# EAGLE board scout_mk1 (EAGLE 7.1.0)
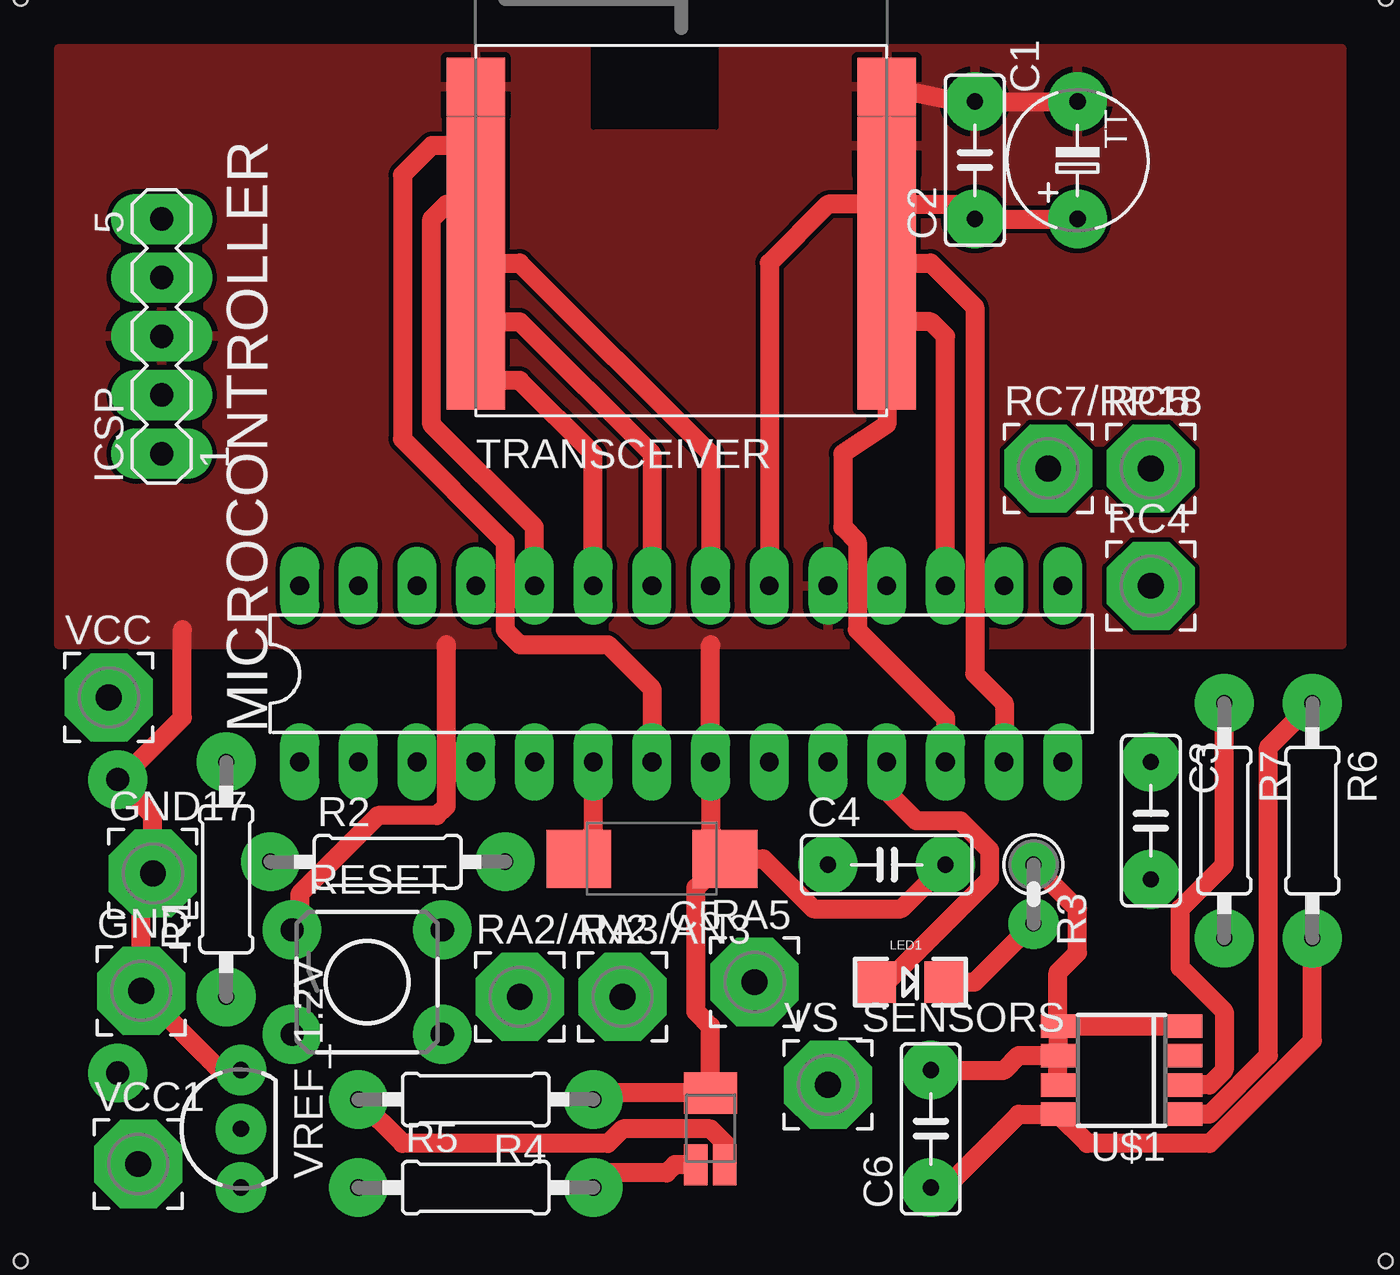
[diagram p0: board, top side]
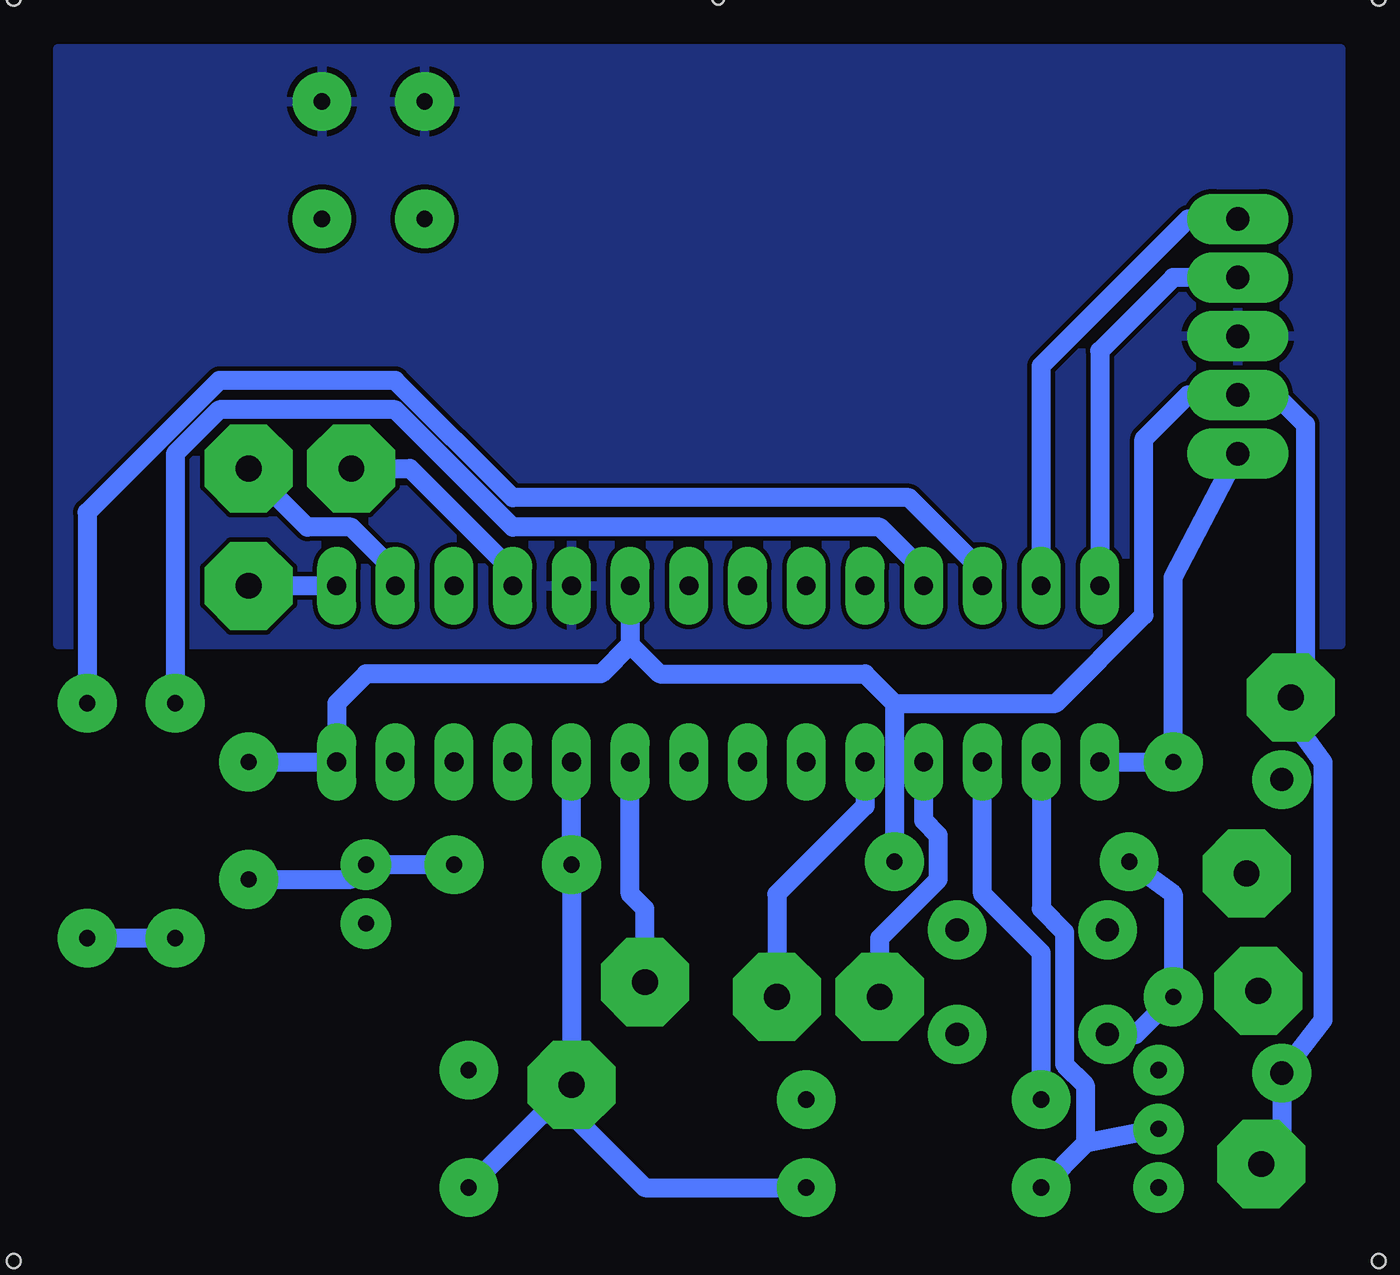
[diagram p1: board, bottom side, seen from below]

No outline drawn. Coordinates in mm, seen from the top.
Copper layers (1*16): Top 0.035mm / dielectric 1.5mm / Bottom 0.035mm
Design rules "default *": minimum track width 10mil, minimum drill 24mil, track to track 8mil, track to pad 8mil, pad to pad 8mil, via to via 8mil, smd to smd 8mil, copper to edge 40mil, drill to drill 8mil, minimum pad ring 10mil, minimum via ring 8mil, stop-mask expansion 4mil, vias tented up to drill 0mil, thermal gap 10mil
Holes 0.6 mm at 8.89,59.69 8.89,5.08 67.94,5.08 67.94,59.69
Holes 0.5 mm at 37.47,59.69

## Footprints (pad centres in the part's own frame; a part is rotated, then mirrored left to right if it is on the bottom)
2XAAA = drill 1 pad 2.54: P$1 0,12.7; P$2 0,0
TT5D6 = drill 0.7 pad 2.54: + -2.54,0; - 2.54,0
C050-025X075 = drill 0.7 pad 2.54: 1 -2.54,0; 2 2.54,0
C/6032-28R = smd 2.794 x 2.5: + 3.16,0; - -3.16,0
3,81/1,1 = drill 1.118 pad 3.81 octagon: 1 0,0
MA05-1 = drill 1.016 pad 2.184 long: 1 -5.08,0; 2 -2.54,0; 3 0,0; 4 2.54,0; 5 5.08,0
LED-1206 = smd 1.778 x 1.778: A -1.5,0; C 1.5,0
SFH5711 = smd 2.286 x 1.778: 1_2 0,1.549 | smd 1.016 x 1.778: 3 -0.635,-1.549; 4 0.61,-1.549
DIL28-3 = drill 0.813 pad 1.676 long: 1 -16.51,-3.81; 2 -13.97,-3.81; 3 -11.43,-3.81; 4 -8.89,-3.81; 5 -6.35,-3.81; 6 -3.81,-3.81; 7 -1.27,-3.81; 8 1.27,-3.81; 9 3.81,-3.81; 10 6.35,-3.81; 11 8.89,-3.81; 12 11.43,-3.81; 13 13.97,-3.81; 14 16.51,-3.81; 15 16.51,3.81; 16 13.97,3.81; 17 11.43,3.81; 18 8.89,3.81; 19 6.35,3.81; 20 3.81,3.81; 21 1.27,3.81; 22 -1.27,3.81; 23 -3.81,3.81; 24 -6.35,3.81; 25 -8.89,3.81; 26 -11.43,3.81; 27 -13.97,3.81; 28 -16.51,3.81
0207/10 = drill 0.7 pad 2.54: 1 -5.08,0; 2 5.08,0
0207/2V = drill 0.7 pad 2.184: 1 -1.27,0; 2 1.27,0
TACTILE-PTH = drill 1 pad 2.54: 1 -3.251,2.261; 2 3.251,2.261; 3 -3.251,-2.261; 4 3.251,-2.261
MRF89XAMXA = smd 2.515 x 2.515: 1 -8.89,-1.27; 2 -8.89,-3.81; 3 -8.89,-6.35; 4 -8.89,-8.89; 5 -8.89,-11.43; 6 -8.89,-13.97; 7 8.89,-13.97; 8 8.89,-11.43; 9 8.89,-8.89; 10 8.89,-6.35; 11 8.89,-3.81; 12 8.89,-1.27
SOIC8 = smd 1.016 x 1.5: 1 -1.905,-2.75; 2 -0.635,-2.75; 3 0.635,-2.75; 4 1.905,-2.75; 5 1.905,2.75; 6 0.635,2.75; 7 -0.635,2.75; 8 -1.905,2.75
LP_O-PBCY-W3 = drill 0.7 pad 2.184: 1 -2.54,0; 2 0,0; 3 2.54,0

## Placement (x,y rotation side)
BATT1  AAA  [2XAAA]  13.08,13.21 0 top
C1  10uF  [TT5D6]  54.61,52.7 90 top
C2  0.1uF  [C050-025X075]  50.16,52.7 90 top
C3  0.1uF  [C050-025X075]  57.78,24.13 270 top
C4  0.1uF  [C050-025X075]  46.35,22.23 0 top
C5  10uF  [C/6032-28R]  36.2,22.48 180 top
C6  0.01uF  [C050-025X075]  48.26,10.79 90 top
GND  [3,81/1,1]  14.1,16.76 0 top
GND17  [3,81/1,1]  14.61,21.84 0 top
ICSP  [MA05-1]  14.99,45.09 90 top
LED1  [LED-1206]  47.37,17.14 0 top
LIGHTSENSOR  SFH5711OSRAM  [SFH5711]  38.73,10.79 0 top
MICROCONTROLLER  PIC18F27J53SP  [DIL28-3]  37.47,30.48 0 top
R1  100  [0207/10]  17.78,21.59 90 top
R2  10k  [0207/10]  24.77,22.35 0 top
R3  10k  [0207/2V]  52.7,20.95 270 top
R4  47k  [0207/10]  28.57,12.06 180 top
R5  1k  [0207/10]  28.57,8.26 0 top
R6  10k  [0207/10]  64.77,24.13 270 top
R7  10k  [0207/10]  60.96,24.13 270 top
RA2/AN2  [3,81/1,1]  30.48,16.51 0 top
RA3/AN3  [3,81/1,1]  34.92,16.51 0 top
RA5  [3,81/1,1]  40.64,17.14 0 top
RC4  [3,81/1,1]  57.78,34.29 0 top
RC5  [3,81/1,1]  57.78,39.37 0 top
RC7/RP18  [3,81/1,1]  53.34,39.37 0 top
RESET  SWITCH-MOMENTARY-2PTH  [TACTILE-PTH]  23.88,17.14 0 top
TRANSCEIVER  MRF89XAM8A  [MRF89XAMXA]  37.47,57.15 0 top
U$1  TMP75CSOIC8  [SOIC8]  56.52,13.34 90 top
VCC  [3,81/1,1]  12.7,29.46 0 top
VCC1  [3,81/1,1]  13.97,9.27 0 top
VREF_1.2V  LM285-1.21.2LP  [LP_O-PBCY-W3]  18.41,10.79 90 top
VS_SENSORS  [3,81/1,1]  43.81,12.7 0 top

## Library data of the parts
BATT1 LIGHTSENSOR U$1 = nio
C1 C5 = resistor
C2-C4 C6 = rcl
GND GND17 RA2/AN2 RA3/AN3 RA5 RC4 RC5 RC7/RP18 VCC VCC1 VS_SENSORS = wirepad
ICSP = con-lstb; OC_FARNELL: unknown; OC_NEWARK: unknown
LED1 = SparkFun-LED
MICROCONTROLLER = microchip; MPN: PIC18F27J53-I/SP; OC_FARNELL: unknown; OC_NEWARK: 63R7839
R1-R7 = resistor; SPICEPREFIX: R
RESET = SparkFun-Electromechanical
TRANSCEIVER = microchip2
VREF_1.2V = texas

## Nets
GND: BATT1.P$1 C1.- C2.2 C3.2 C4.2 C5.- C6.2 GND17.1 GND.1 ICSP.3 LIGHTSENSOR.1_2 MICROCONTROLLER.8 MICROCONTROLLER.19 R3.1 R4.1 RESET.1 TRANSCEIVER.1 TRANSCEIVER.11 TRANSCEIVER.12 U$1.4 U$1.5 U$1.6 U$1.7 VREF_1.2V.3
N$2: LIGHTSENSOR.4 MICROCONTROLLER.3 R4.2
N$3: ICSP.1 MICROCONTROLLER.1 R1.2
N$4: C5.+ MICROCONTROLLER.6
N$5: R1.1 R2.1 RESET.3
N$6: ICSP.4 MICROCONTROLLER.28
N$7: ICSP.5 MICROCONTROLLER.27
N$8: MICROCONTROLLER.2 R5.1 VREF_1.2V.2
N$9: MICROCONTROLLER.7 TRANSCEIVER.2
N$10: MICROCONTROLLER.23 TRANSCEIVER.6
N$11: MICROCONTROLLER.26 R6.1 U$1.1
N$12: MICROCONTROLLER.25 R7.1 U$1.2
N$13: MICROCONTROLLER.9 RA5.1
N$14: LED1.C R3.2
N$15: LED1.A MICROCONTROLLER.11
N$16: MICROCONTROLLER.4 RA2/AN2.1
N$17: MICROCONTROLLER.5 RA3/AN3.1
N$19: MICROCONTROLLER.12 TRANSCEIVER.7
N$21: MICROCONTROLLER.24 TRANSCEIVER.3
N$22: MICROCONTROLLER.22 TRANSCEIVER.5
N$23: MICROCONTROLLER.21 TRANSCEIVER.4
N$24: MICROCONTROLLER.13 TRANSCEIVER.9
N$25: MICROCONTROLLER.17 TRANSCEIVER.8
N$26: MICROCONTROLLER.18 RC7/RP18.1
N$27: MICROCONTROLLER.16 RC5.1
N$28: MICROCONTROLLER.15 RC4.1
N$29: C4.1 C6.1 LIGHTSENSOR.3 MICROCONTROLLER.10 R5.2 R6.2 R7.2 U$1.8 VS_SENSORS.1
VCC: BATT1.P$2 C1.+ C2.1 C3.1 ICSP.2 MICROCONTROLLER.14 MICROCONTROLLER.20 R2.2 TRANSCEIVER.10 VCC1.1 VCC.1

## Tracks (layer width: path | path; a pad name or v marks a point on that pad's centre or on a via)
GND
  Top 0.813: C5.- 38.73,23.73 MICROCONTROLLER.8 38.73,31.75 | 27.3,31.75 27.3,24.77 26.89,24.35 24.35,24.35 20.95,20.95 20.95,19.74 RESET.1 | TRANSCEIVER.12 49.53,55.24 C2.2 C1.- | C5.- 41.02,22.48 43.18,20.32 46.99,20.32 C4.2 | C5.- 38.1,21.22 38.1,15.88 38.73,15.24 LIGHTSENSOR.1_2 33.93,12.34 R4.1 | C6.2 51.44,13.34 52.07,13.97 U$1.6 | U$1.7 U$1.6 | U$1.5 U$1.6 | U$1.5 53.77,17.57 54.61,18.41 54.61,20.32 R3.1 | U$1.4 U$1.5 | 15.88,32.38 15.88,28.57 13.21,25.91 BATT1.P$1 14.61,24.38 GND17.1 14.1,21.34 GND.1 17.53,13.34 VREF_1.2V.3
  Bottom 0.813: C3.2 53.34,21.59 R3.1 C4.2
  pour Bottom (isolate 0.025): 10.54,57.53 10.54,31.75 66.04,31.75 66.04,57.53
  pour Top (isolate 0.025): 10.54,57.53 10.54,31.75 66.04,31.75 66.04,57.53
N$2
  Top 0.813: LIGHTSENSOR.4 39.34,10.19 38.73,10.79 34.92,10.79 34.29,10.16 25.4,10.16 R4.2
  Bottom 0.813: R4.2 23.5,18.41 26.04,20.95 MICROCONTROLLER.3
N$3
  Bottom 0.813: MICROCONTROLLER.1 R1.2 17.78,34.67 ICSP.1
N$4
  Top 0.813: MICROCONTROLLER.6 33.66,23.73 C5.+
N$5
  Bottom 0.813: RESET.3 19.41,14.88 R1.1 17.78,20.95 R2.1
N$6
  Bottom 0.813: ICSP.4 17.78,47.62 20.95,44.45 MICROCONTROLLER.28
N$7
  Bottom 0.813: MICROCONTROLLER.27 23.5,43.81 17.14,50.16 ICSP.5
N$8
  Bottom 0.813: VREF_1.2V.2 21.59,10.16 | 21.59,10.16 R5.1 | MICROCONTROLLER.2 23.5,20.32 22.48,19.3 22.48,13.59 21.59,12.7 21.59,10.16
N$9
  Top 0.813: TRANSCEIVER.2 26.67,53.34 25.4,52.07 25.4,40.64 29.84,36.2 29.84,32.38 30.48,31.75 34.29,31.75 36.2,29.84 MICROCONTROLLER.7
N$10
  Top 0.813: MICROCONTROLLER.23 33.66,40.01 30.48,43.18 TRANSCEIVER.6
N$11
  Top 0.813: R6.1 62.87,27.3 62.87,13.97 60.33,11.43 U$1.1
  Bottom 0.813: MICROCONTROLLER.26 26.04,34.92 29.21,38.1 46.35,38.1 51.44,43.18 59.05,43.18 64.77,37.47 R6.1
N$12
  Top 0.813: R7.1 60.96,22.23 59.05,20.32 59.05,17.78 60.96,15.88 60.96,13.34 60.33,12.7 U$1.2
  Bottom 0.813: MICROCONTROLLER.25 28.57,34.92 30.48,36.83 46.35,36.83 51.44,41.91 59.05,41.91 60.96,40.01 R7.1
N$13
  Bottom 0.813: RA5.1 40.64,20.32 41.27,20.95 MICROCONTROLLER.9
N$14
  Top 0.813: LED1.C 50.16,17.14 R3.2
N$15
  Top 0.813: MICROCONTROLLER.11 46.35,25.4 47.62,24.13 49.53,24.13 50.8,22.86 50.8,21.59 46.35,17.14 LED1.A
N$16
  Bottom 0.813: RA2/AN2.1 30.48,19.05 27.94,21.59 27.94,23.5 28.57,24.13 MICROCONTROLLER.4
N$17
  Bottom 0.813: MICROCONTROLLER.5 31.11,24.77 34.92,20.95 RA3/AN3.1
N$19
  Top 0.813: TRANSCEIVER.7 46.35,41.27 44.45,40.01 44.45,36.83 45.09,36.2 45.09,32.38 48.9,28.57 MICROCONTROLLER.12
N$21
  Top 0.813: MICROCONTROLLER.24 31.11,36.83 26.67,41.27 26.67,50.16 27.3,50.8 TRANSCEIVER.3
N$22
  Top 0.813: TRANSCEIVER.5 30.48,45.72 36.2,40.01 MICROCONTROLLER.22
N$23
  Top 0.813: TRANSCEIVER.4 30.48,48.26 38.73,40.01 MICROCONTROLLER.21
N$24
  Top 0.813: TRANSCEIVER.9 48.26,48.26 50.16,46.35 50.16,30.48 51.44,29.21 MICROCONTROLLER.13
N$25
  Top 0.813: MICROCONTROLLER.17 48.9,45.09 48.26,45.72 TRANSCEIVER.8
N$26
  Bottom 0.813: RC7/RP18.1 50.8,39.37 46.35,34.92 MICROCONTROLLER.18
N$27
  Bottom 0.813: MICROCONTROLLER.16 51.44,34.92 53.34,36.83 55.24,36.83 RC5.1
N$28
  Bottom 0.813: MICROCONTROLLER.15 RC4.1
N$29
  Top 0.813: R6.2 64.77,14.61 60.33,10.16 55.03,10.16 U$1.8 52.07,11.43 48.9,8.26 C6.1 | LIGHTSENSOR.3 37.19,9.25 36.83,8.89 34.29,8.89 R5.2
  Bottom 0.813: R6.2 R7.2 | MICROCONTROLLER.10 C4.1 VS_SENSORS.1 43.81,11.43 | 43.81,11.43 40.64,8.26 R5.2 | 43.81,11.43 45.09,11.43 C6.1
VCC
  Top 0.813: MICROCONTROLLER.20 41.27,48.26 43.81,50.8 TRANSCEIVER.10 49.53,50.8 C2.1 C1.+
  Bottom 0.813: 41.27,31.75 42.55,30.48 52.7,30.48 53.98,29.21 MICROCONTROLLER.14 C3.1 | MICROCONTROLLER.20 41.27,31.75 | 41.27,31.75 40.01,30.48 31.11,30.48 29.84,29.21 | 29.84,29.21 R2.2 | 29.84,29.21 22.86,29.21 19.05,33.02 19.05,40.64 17.14,42.55 ICSP.2 13.34,42.55 12.06,41.27 12.06,30.1 VCC.1 12.7,28.57 11.3,26.67 11.3,15.49 BATT1.P$2 13.08,10.16 VCC1.1